# Altium PCB 2021.PcbDoc
Units mil, origin at the board's own origin, x right, y up, seen from the top; angles counter-clockwise.
Board outline 6000 x 4000 mil, 2 copper layers (Top Layer, Bottom Layer); 29 components, 16 nets, 79 pads, 3 vias.
Unrouted connection lines stored in the file: 1.
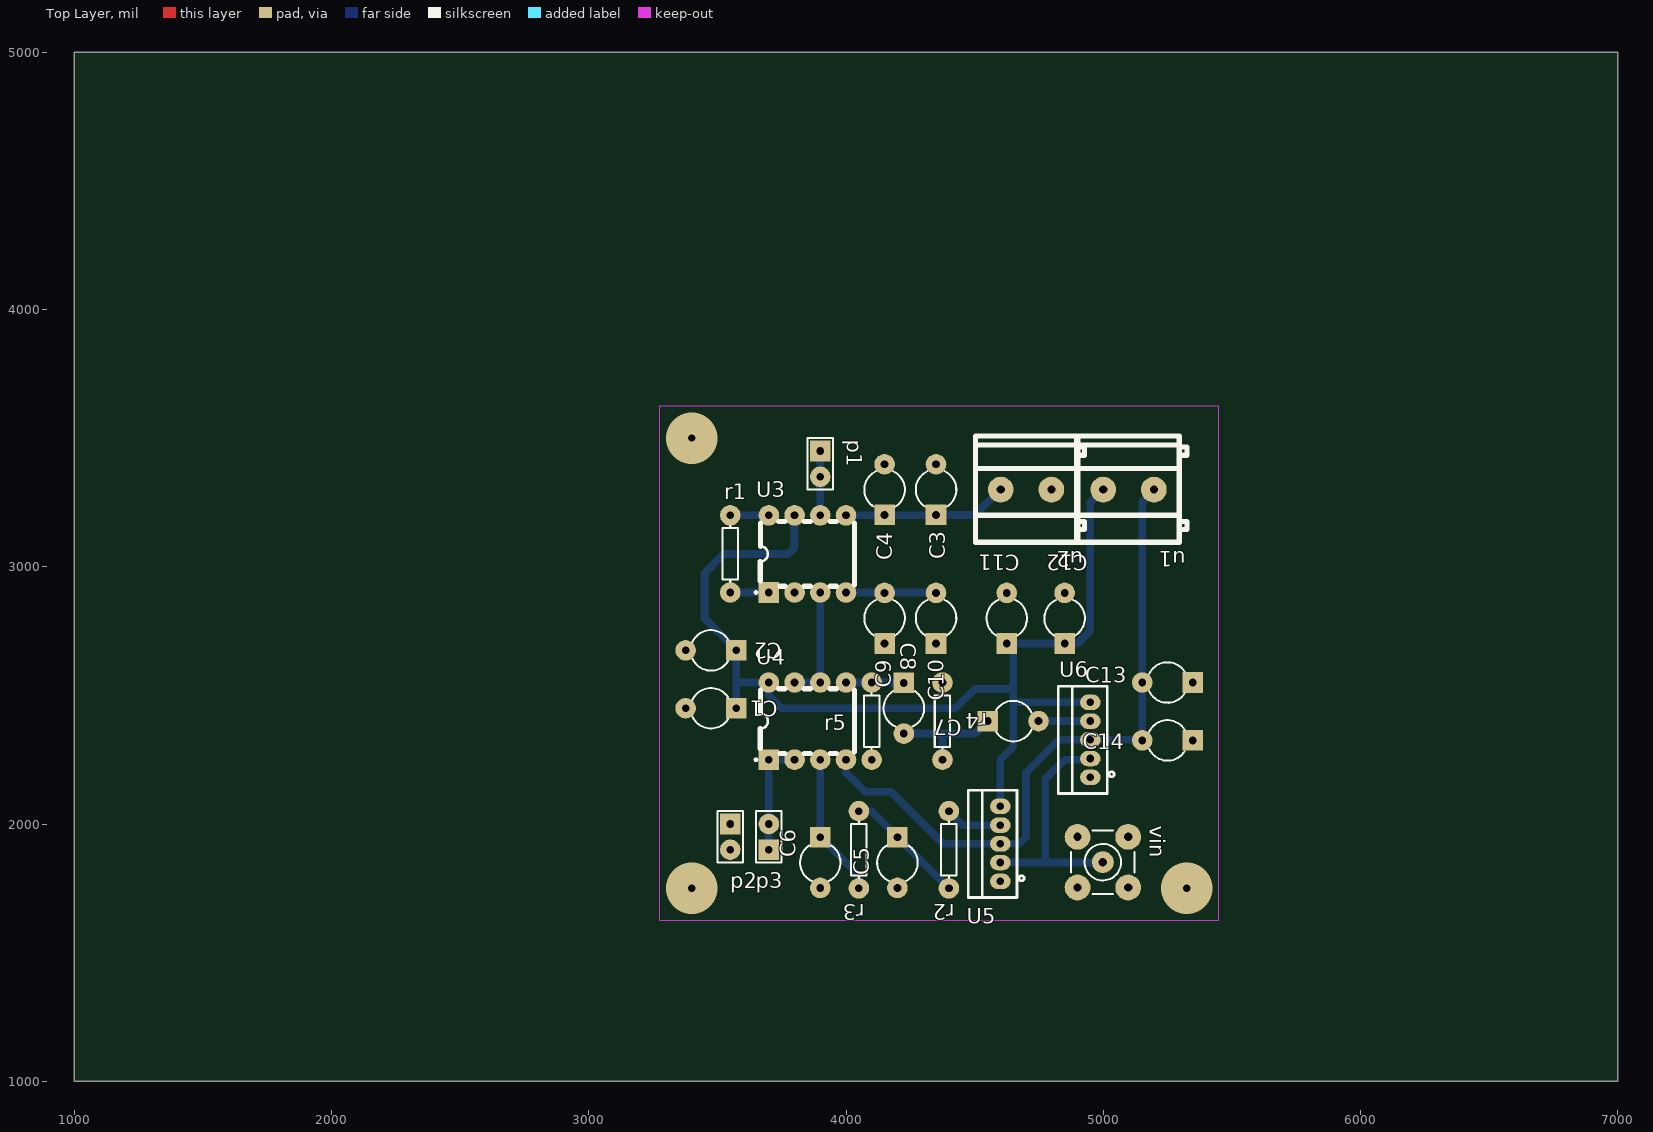
[diagram p0: Top Layer view]
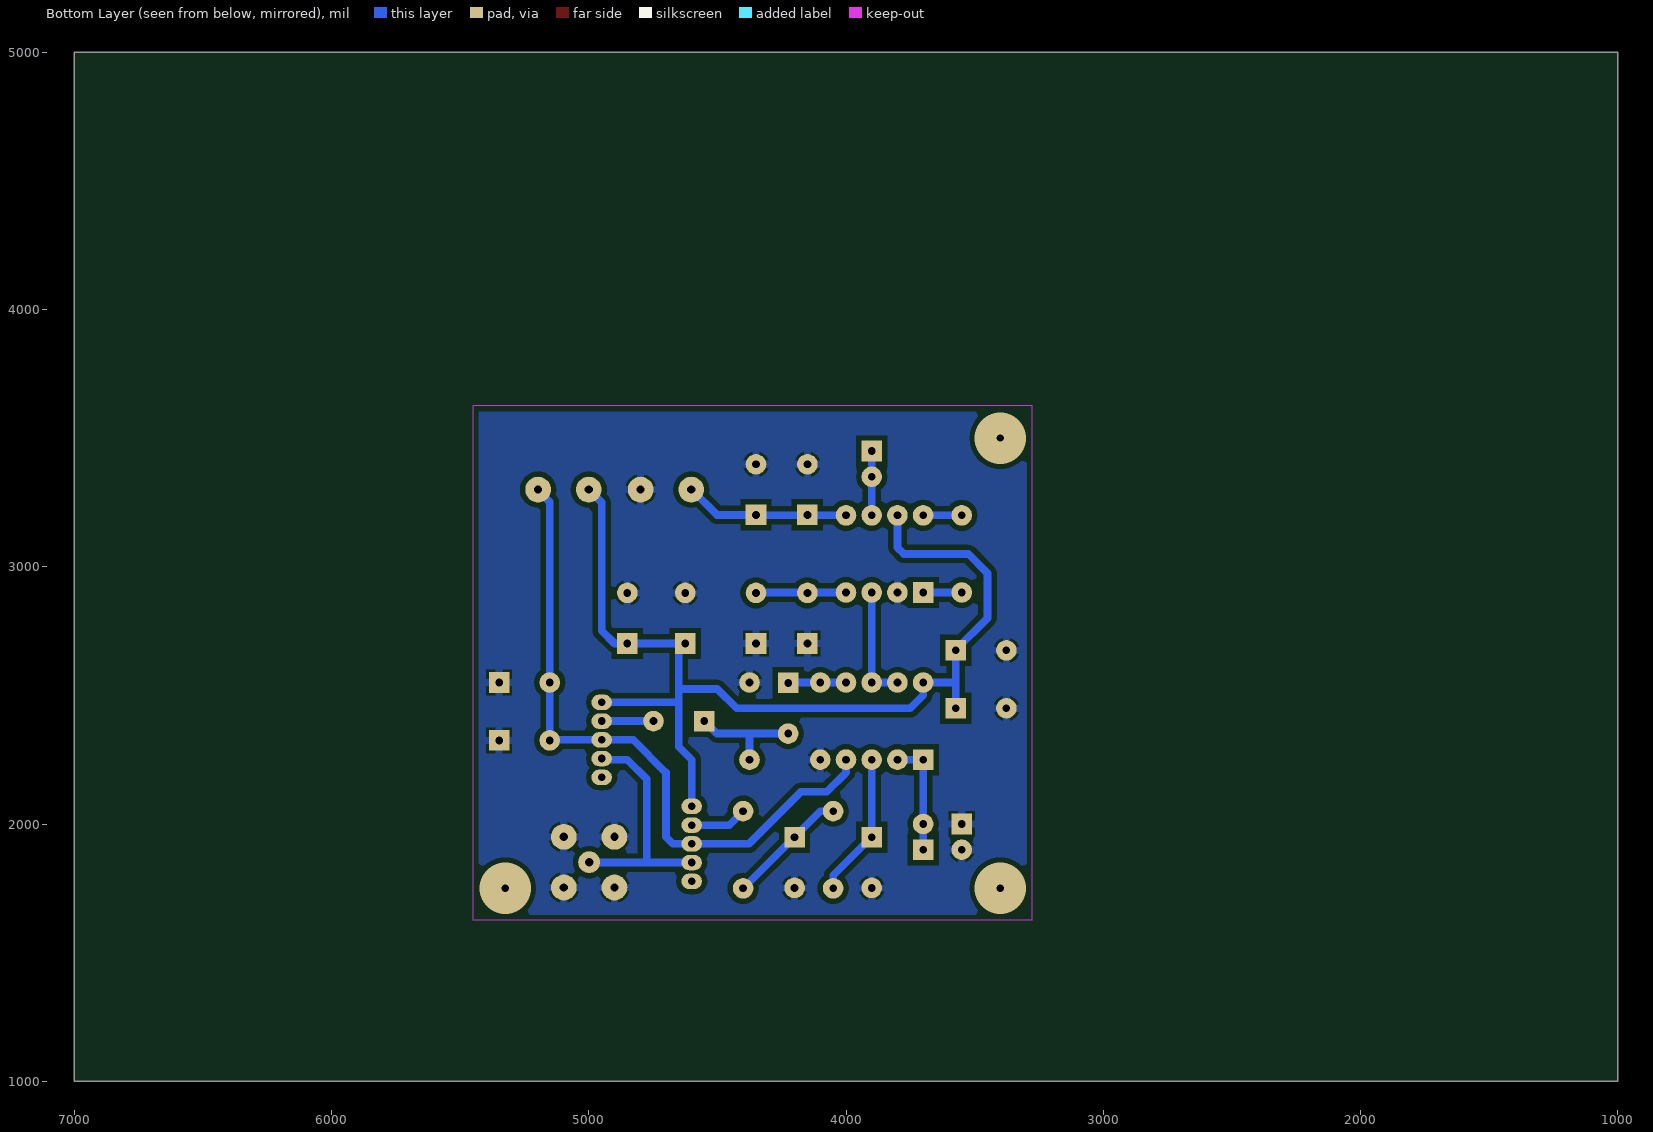
[diagram p1: Bottom Layer view, seen from below]

## Layer stack, top to bottom
Top Solder: solder mask 0.4, Solder Resist, Dk 3.5
Top Layer: signal copper 1.4
Dielectric1: dielectric 12.6, FR-4, Dk 4.8
Bottom Layer: signal copper 1.4
Bottom Solder: solder mask 0.4, Solder Resist, Dk 3.5

## Board outline
1000,1000 7000,1000 7000,5000 1000,5000

## Design rules (kind name [scope] priority, off if disabled: settings)
Clearance [All] p1: gap=20 ignorepadtopadclearanceinfootprint=FALSE
FabricationTestPointUsage TestPointUsage [All] p1: valid=0 allowmultiple=FALSE
FabricationTestpoint Testpoint [All] p1: side=3 testpointundercomponent=TRUE minsize=40 maxsize=100 preferedsize=60 minholesize=0 maxholesize=40 preferedholesize=32 testpointgrid=1 allowsidetop=TRUE allowsidebottom=TRUE usegrid=TRUE gridtolerance=0.01
MinimumSolderMaskSliver [All] p1 off: minsoldermaskwidth=10
PolygonConnect [All] p1: connectstyle=Relief reliefconductorwidth=30 reliefentries=4 polygonreliefangle="90 Angle" airgapwidth=10
RoutingVias [All] p1: holewidth=28 width=50 viastyle="Through Hole" minholewidth=28 minwidth=50 maxholewidth=28 maxwidth=50
ShortCircuit [All] p1 off: allowed=FALSE
SilkToSolderMaskClearance SilkscreenOverComponentPads [IsPad] p1 off: minsilkscreentomaskgap=10 clearancetoexposedcopper=TRUE
SolderMaskExpansion [All] p1: expansion=4
Width [All] p1: maxlimit=50 minlimit=30 preferedwidth=30
25 further rules are at their usual default settings.

## Components (designator, comment, footprint, x,y, rotation, side; value= is the part's Value field where it differs from the comment)
C1 "Cap2" CAPR5-4X5 3475,2450 r180 top value=100pF
C2 "Cap2" CAPR5-4X5 3475,2675 r180 top value=100pF
C3 "Cap2" CAPR5-4X5 4350,3300 r90 top value=100pF
C4 "Cap2" CAPR5-4X5 4150,3300 r90 top value=100pF
C5 "Cap2" CAPR5-4X5 4200,1850 r270 top value=80n
C6 "Cap2" CAPR5-4X5 3900,1850 r270 top value=40n
C7 "Cap2" CAPR5-4X5 4650,2400 r0 top value=100pF
C8 "Cap2" CAPR5-4X5 4225,2450 r270 top value=100pF
C9 "Cap2" CAPR5-4X5 4150,2800 r90 top value=100pF
C10 "Cap2" CAPR5-4X5 4350,2800 r90 top value=100pF
C11 "Cap2" CAPR5-4X5 4625,2800 r90 top value=100pF
C12 "Cap2" CAPR5-4X5 4850,2800 r90 top value=100pF
C13 "Cap2" CAPR5-4X5 5250,2550 r180 top value=100pF
C14 "Cap2" CAPR5-4X5 5250,2325 r180 top value=100pF
p1 "Header 2" HDR1X2 3900,3450 r270 top
p2 "Header 2" HDR1X2 3550,2000 r270 top
p3 "Header 2" HDR1X2 3700,1900 r90 top
r1 "Res1" AXIAL-0.3 3550,3050 r90 top value=1K
r2 "Res1" AXIAL-0.3 4400,1900 r270 top value=5.6k
r3 "Res1" AXIAL-0.3 4050,1900 r270 top value=5.6k
r4 "Res1" AXIAL-0.3 4375,2400 r90 top value=1K
r5 "Res1" AXIAL-0.3 4100,2400 r270 top value=1K
u1 "KF128-5.0-2P" CONN-TH_P5.00_KF128-5.0-2P 5098.43,3300 r180 top
u2 "KF128-5.0-2P" CONN-TH_P5.00_KF128-5.0-2P 4700,3300 r180 top
U3 "AD620ANZ" DIP-8_L9.3-W6.4-P2.54-LS7.6-BL 3850,3050 r0 top
U4 "op2727" DIP-8_L9.3-W6.4-P2.54-LS7.6-BL 3850,2400 r0 top
U5 "LM2596T-12_C194353" TO-220-5L_L10.2-W4.5-P1.71-L 4600,1922.84 r90 top
U6 "LM2596T-12_C194353" TO-220-5L_L10.2-W4.5-P1.71-L 4950,2327.16 r90 top
vin "SMB" SMB_V-RJ45 4998.43,1851.57 r270 top

## Footprints (in the part's own frame and the unit in brackets; to place one, negate y for a bottom-side part, rotate by r counter-clockwise, add the part's x,y. Pads: shape width x height; smd on the part's side, far side on the other; paste and mask are expansions set on the pad)
AXIAL-0.3 [mil] "Resistor; 2 Leads"
  round 80 hole 30: 1(-150,0) 2(150,0)
  silkscreen extent -109,-30 109,30
CAPR5-4X5 [mil] "Capacitor; 2 Leads"
  rect 80x80 hole 30: 1(-98.43,0)
  round 80 hole 30: 2(98.43,0)
  silkscreen extent -66,-79 72,79
CONN-TH_P5.00_KF128-5.0-2P [mil]
  round 100 hole 32: 1(-98.43,0) 2(98.43,0)
  silkscreen extent -227,-209 197,205
DIP-8_L9.3-W6.4-P2.54-LS7.6-BL [mil]
  rect 80x80 hole 30: 1(-150,-150)
  round 80 hole 30: 2(-50,-150) 3(50,-150) 4(150,-150) 5(150,150) 6(50,150) 7(-50,150) 8(-150,150)
  silkscreen extent -204,-154 183,126
HDR1X2 [mil] "Connector; Header; 2 Position"
  rect 80x80 hole 30: 1(0,0)
  round 80 hole 30: 2(100,0)
  silkscreen extent -50,-50 150,50
SMB_V-RJ45 [mm] "Connector; SMB Straight"
  round 2.159 hole 0.813: 1(0,0)
  round 2.54 hole 0.813: 2(-2.5,2.5) 2(-2.5,-2.5) 2(2.5,2.5) 2(2.5,-2.5)
  silkscreen extent -3.15,-3.15 3.15,3.15
TO-220-5L_L10.2-W4.5-P1.71-L [mil]
  oval 60x80 hole 30: 1(-145.67,0) 2(-72.84,0) 3(0,0) 4(72.84,0) 5(145.67,0)
  silkscreen extent -209,-93 209,125

## Part data
C1 C2 C3 C4 C5 C6 C7 C8 C9 C10 C11 C12 C13 C14: "Capacitor", PackageReference=CAPR5-4X5, Published=23-Sep-2002, Publisher="Altium Limited"
p1 p2 p3: "Header, 2-Pin", LatestRevisionDate=17-Jul-2002, LatestRevisionNote="Re-released for DXP Platform.", Publisher="Altium Limited"
r1 r2 r3 r4 r5: "Resistor", LatestRevisionDate=17-Jul-2002, LatestRevisionNote="Re-released for DXP Platform.", PackageReference=AXIAL-0.3, Published=8-Jun-2000, Publisher="Altium Limited"
u1 u2: BOM_JLCPCB Part Class="Extended Part", BOM_Manufacturer="Cixi Kefa Elec", BOM_Manufacturer Part=KF128-5.0-2P, BOM_Supplier=LCSC, BOM_Supplier Part=C474950, Contributor=LCSC, spicePre=U, spiceSymbolName=KF128-5.0-2P
U3: BOM_JLCPCB Part Class="Extended Part", BOM_Manufacturer=ADI, BOM_Manufacturer Part=AD620ANZ, BOM_Supplier=LCSC, BOM_Supplier Part=C9680, spicePre=X, spiceSymbolName=AD620ANZ
U4: library part AD620ANZ, BOM_JLCPCB Part Class="Extended Part", BOM_Manufacturer=ADI, BOM_Manufacturer Part=AD620ANZ, BOM_Supplier=LCSC, BOM_Supplier Part=C9680, spicePre=X, spiceSymbolName=AD620ANZ
U5 U6: BOM_JLCPCB Part Class="Extended Part", BOM_Manufacturer=HGSEMI, BOM_Manufacturer Part=LM2596T-12, BOM_Supplier=LCSC, BOM_Supplier Part=C194353, Contributor=LCSC, spicePre=U, spiceSymbolName=LM2596T-12_C194353
vin: "SMB Straight Connector", LatestRevisionDate=17-Jul-2002, LatestRevisionNote="Re-released for DXP Platform.", Publisher="Altium Limited"

## Via types
v1: diameter 200, hole 28, Top Layer to Bottom Layer, 3 vias

## Nets (pads, with @x,y where several pads share a name; then routed paths per layer and width w, separated by ;. In a path a pad name is that pad's centre, name@x,y a point inside that pad or via, vN(x,y) a via of type N, cw(c..) or ccw(c..) an arc to the next point about the centre after c; other vN are vias at no path point)
+5v: C1.1 C2.1 C11.1 C12.1 u1.2 U3.7 U4.8 U5.5 U6.5 | length 4138.6
  Bottom Layer w30: C1.1 3573.43,2550 ; U3.7 3800,3075 3775,3050 3525,3050 3450,2975 3450,2800 3575,2675 3573.43,2673.43 3573.43,2550 ; U5.5 4600,2250 4650,2300 4650,2475 ; C11.1@4626.57,2701.57 C12.1 4900,2701.57 4950,2751.57 4950,3250 u1.2 ; C11.1@4650,2700 4650,2525 ; U6.5 4652.17,2472.83 4650,2475 ; 3573.43,2550 U4.8 3700,2500 3750,2450 4425,2450 4500,2525 4650,2525 ; 4650,2475 4650,2525
-5v: C9.2 C10.2 C13.2 C14.2 u1.1 U3.4 U4.4 U5.3 U6.3 | length 2975.3
  Bottom Layer w30: U4.4 4000,2200 4075,2125 4175,2125 4377.16,1922.84 U5.3 4672.84,1922.84 4700,1950 4700,2200 4827.16,2327.16 U6.3 5147.84,2327.16 5150,2325 5151.57,2326.57 C13.2 5151.57,3251.57 u1.1@5200,3300 ; U3.4 C10.2@4350,2900
GND: C1.2 C2.2 C3.2 C4.2 C5.2 C6.2 C9.1 C10.1 C11.2 C12.2 C13.1 C14.1 p2.1 p2.2 r4.2 r5.2 u2.1 U3.2 vin.2
NetC3_1: C3.1 C4.1 u2.2 U3.5 | length 640.8
  Bottom Layer w30: U3.5 C3.1@4350,3200 ; C3.1 4501.57,3201.57 u2.2@4600,3300
NetC5_1: C5.1 r2.2 r3.1 | length 474.3
  Bottom Layer w30: r3.1 4100,2050 r2.2
NetC6_1: C6.1 r3.2 U4.3 | length 562.1
  Bottom Layer w30: U4.3 3900,1950 4050,1800 r3.2
NetC7_1: C7.1 C8.2 r4.1 | length 445.1
  Bottom Layer w30: C8.2 4501.57,2351.57 C7.1@4550,2400 ; r4.1 4375,2350
NetC7_2: C7.2 U6.4 | length 200
  Bottom Layer w30: C7.2@4750,2400 U6.4
NetC8_1: C8.1 r5.1 U4.5 | length 225
  Bottom Layer w30: U4.5 C8.1@4225,2550
Netp1_1: p1.1 p1.2 U3.6 | length 250
  Bottom Layer w30: U3.6 p1.2 p1.1
Netp3_1: p3.1 p3.2 U4.1 U4.2 | length 450
  Bottom Layer w30: p3.1 p3.2 U4.1 U4.2
Netr1_1: r1.1 U3.1 | length 150
  Bottom Layer w30: r1.1 U3.1
Netr1_2: r1.2 U3.8 | length 150
  Bottom Layer w30: r1.2 U3.8
Netr2_1: r2.1 U5.4 | length 222.5
  Bottom Layer w30: r2.1 4454.33,1995.67 U5.4
NetU3_3: U3.3 U4.6 U4.7 | length 450
  Bottom Layer w30: U4.7 U4.6 U3.3
NetU5_2: U5.2 U6.2 vin.1 | length 932.9
  Bottom Layer w30: U5.2 4775,1850 ; U6.2 4945.67,2250 4850,2250 4775,2175 4775,1850 ; vin.1@5000,1850 4775,1850
pads on no net: U5.1 U6.1
copper on no net:
  other v1: 3400,1750 5325,1750 3400,3500

## Polygon pours and split planes (outlines as drawn)
GND on Bottom Layer "Top Layer-No Net" (solid, remove dead copper, pour order 0): 3275,3625 5450,3625 5450,1625 3275,1625

## Keep-outs
Keep-Out Layer:
  lines w3.94: 3275,1625 3275,3625 5450,3625 5450,1625 3275,1625